# Altium PCB oled.PcbDoc
Units mil, origin at the board's own origin, x right, y up, seen from the top; angles counter-clockwise.
Board outline 6000 x 4000 mil, 2 copper layers (Top Layer, Bottom Layer); 14 components, 14 nets, 67 pads, 0 vias.
Unrouted connection lines stored in the file: 28.
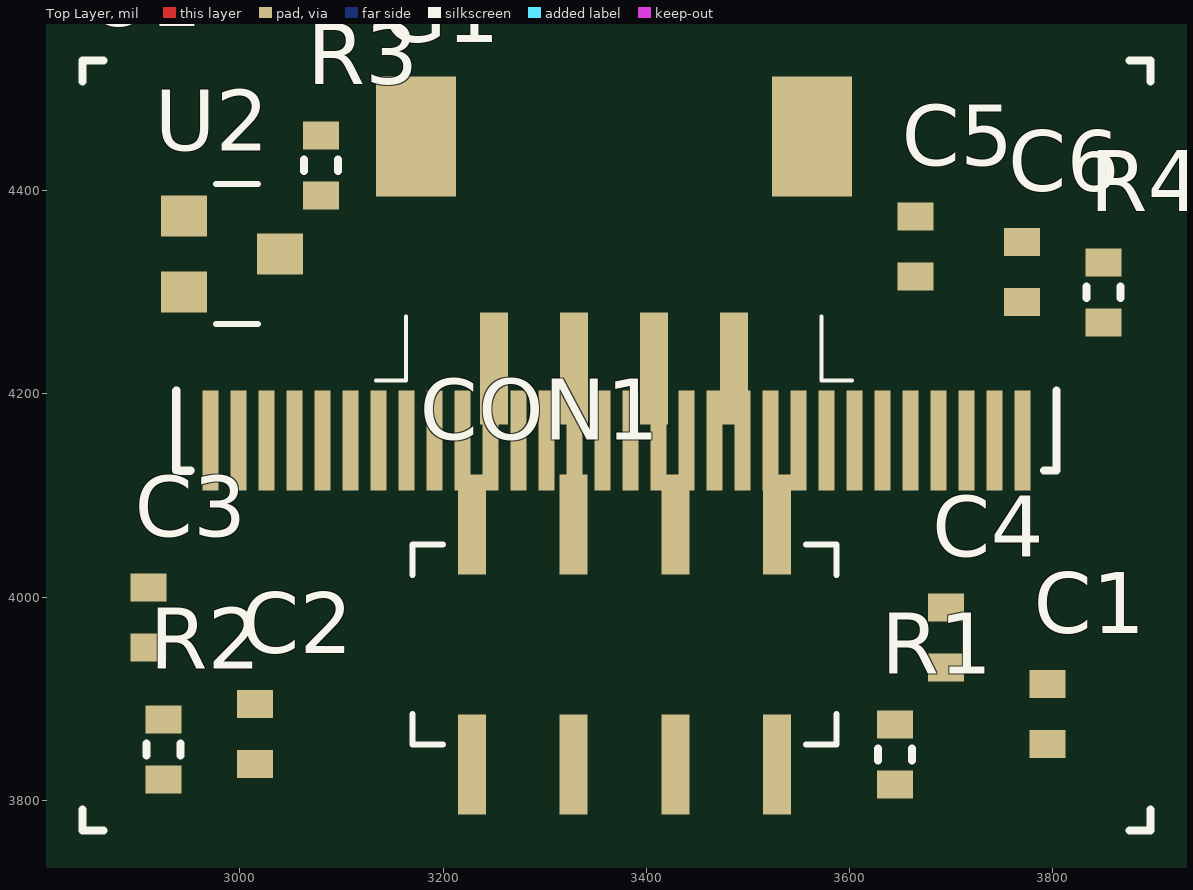
[diagram p0: Top Layer view]
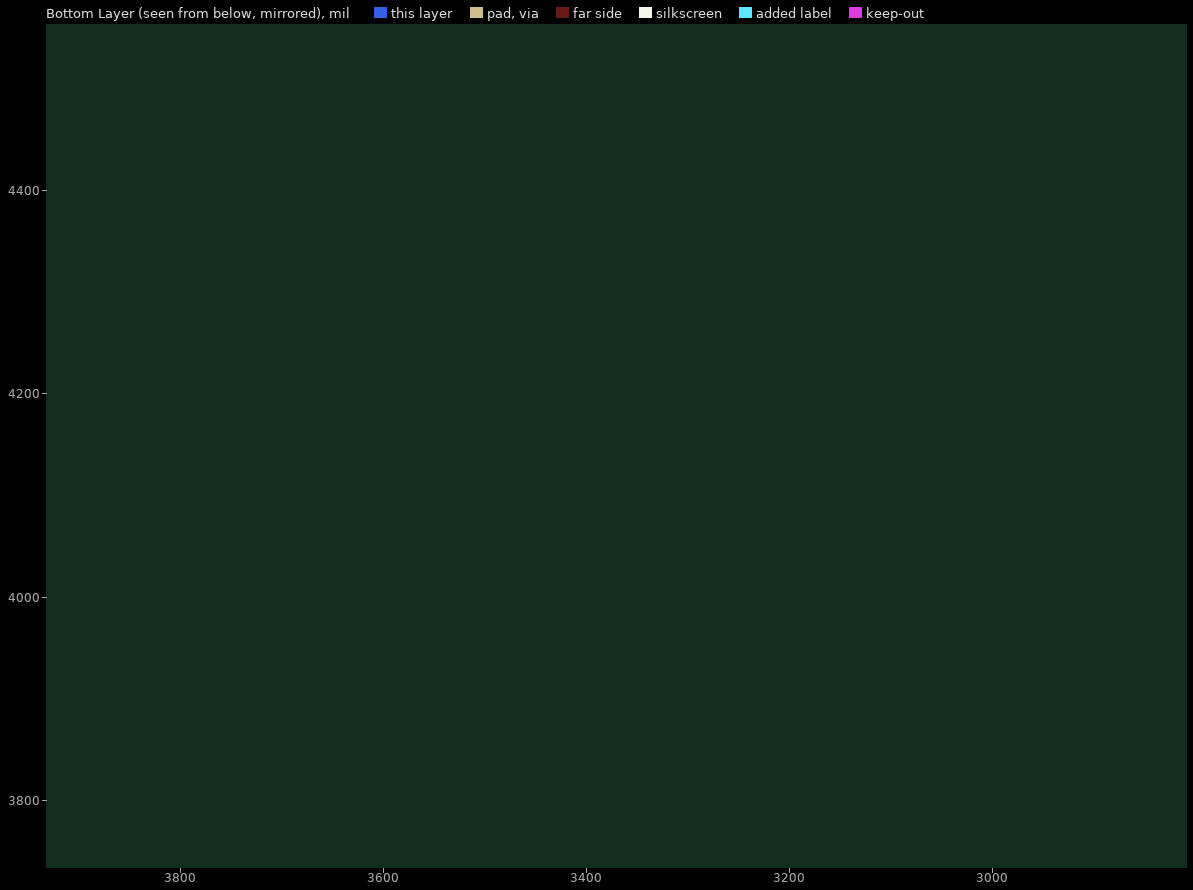
[diagram p1: Bottom Layer view, seen from below]

## Layer stack, top to bottom
Top Layer: signal copper 1.4
Dielectric: dielectric 12.6, FR-4, Dk 4.8
Bottom Layer: signal copper 1.4

## Board outline
1000,1000 7000,1000 7000,5000 1000,5000

## Design rules (kind name [scope] priority, off if disabled: settings)
Clearance [All] p1: gap=10
PolygonConnect [All] p1: connectstyle=Relief reliefconductorwidth=10 reliefentries=4 polygonreliefangle="90 Angle"
RoutingVias [All] p1: holewidth=28 width=50 viastyle="Through Hole" minholewidth=28 minwidth=50 maxholewidth=28 maxwidth=50
SilkscreenOverComponentPads [All] p1: minsilkscreentomaskgap=10
SolderMaskExpansion [All] p1: expansion=4
Width [All] p1: maxlimit=10 minlimit=10 preferedwidth=10
27 further rules are at their usual default settings.

## Components (designator, comment, footprint, x,y, rotation, side; value= is the part's Value field where it differs from the comment)
C1 "" 0603_C 3795,3885 r0 top
C2 "" 0603_C 3015,3865 r0 top
C3 "" 0603_C 2910,3980 r0 top
C4 "" 0603_C 3695,3960 r0 top
C5 "" 0603_C 3665,4345 r0 top
C6 "" 0603_C 3770,4320 r0 top
CON1 "CON2x4" 2x4P_SMT_2.54mm 3170,3855 r90 top
G1 "Grave" S4B-PH-SM4 3250,4225 r90 top
R1 "910K" 0603_R 3645,3845 r0 top
R2 "4.7K" 0603_R 2925,3850 r0 top
R3 "4.7K" 0603_R 3080,4425 r0 top
R4 "4.7K" 0603_R 3850,4300 r0 top
U1 "SSD1306" OLED-0.96-30 2845,3770 r0 top
U2 "662K" SOT23-3 2945,4375 r0 top

## Footprints (in the part's own frame and the unit in brackets; to place one, negate y for a bottom-side part, rotate by r counter-clockwise, add the part's x,y. Pads: shape width x height; smd on the part's side, far side on the other; paste and mask are expansions set on the pad)
2x4P_SMT_2.54mm [mm]
  rect 2.5x0.7 smd: 1(-0.5,-1.49) 2(5.5,-1.49) 3(-0.5,-4.03) 4(5.5,-4.03) 5(-0.5,-6.57) 6(5.5,-6.57) 7(-0.5,-9.11) 8(5.5,-9.11)
  silkscreen extent 0,-10.6 5,0
0603_C [mm] "Microbit"
  rect 0.9x0.7 smd: 1(0,0.75) 2(0,-0.75)
  body extent -0.42,-0.75 0.43,0.8, height 0.45
0603_R [mm] "Microbit"
  rect 0.9x0.7 smd: 1(0,0.75) 2(0,-0.75)
  silkscreen extent -0.43,-0.15 0.43,0.15, body extent -0.42,-0.75 0.43,0.8, height 0.45
OLED-0.96-30 [mm]
  rect 0.4x2.5 smd: 1(3.2,9.754) 2(3.9,9.754) 3(4.6,9.754) 4(5.3,9.754) 5(6,9.754) 6(6.7,9.754) 7(7.4,9.754) 8(8.1,9.754) 9(8.8,9.754) 10(9.5,9.754) 11(10.2,9.754) 12(10.9,9.754) 13(11.6,9.754) 14(12.3,9.754) 15(13,9.754) 16(13.7,9.754) 17(14.4,9.754) 18(15.1,9.754) 19(15.8,9.754) 20(16.5,9.754) 21(17.2,9.754) 22(17.9,9.754) 23(18.6,9.754) 24(19.3,9.754) 25(20,9.754) 26(20.7,9.754) 27(21.4,9.754) 28(22.1,9.754) 29(22.8,9.754) 30(23.5,9.754)
  silkscreen extent 0,0 26.7,19.26
S4B-PH-SM4 [mm]
  rect 2.8x0.7 smd: 1(0,0) 2(0,-2) 3(0,-4) 4(0,-6)
  rect 3x2 smd: P1(5.8,1.95) P2(5.8,-7.95)
  silkscreen extent -0.3,-8.95 1.3,2.95
SOT23-3 [mil]
  rect 45x40 smd: 1(0,0) 2(0,-74.8) 3(94.49,-37.4)
  silkscreen extent 31,-106 73,31

## Part data
C1 C2 C3 C4 C5 C6: library part Cap
G1: library part Grove
R1 R2 R3 R4: library part Res
U2: "或 S-1206B30-M3"

## Nets (pads, with @x,y where several pads share a name; then routed paths per layer and width w, separated by ;. In a path a pad name is that pad's centre, name@x,y a point inside that pad or via, vN(x,y) a via of type N, cw(c..) or ccw(c..) an arc to the next point about the centre after c; other vN are vias at no path point)
3V3: C1.2 CON1.2 R2.2 R4.2 U1.6 U1.9 U1.11 U2.2
GND: C1.1 C2.2 C3.1 C6.1 CON1.5 G1.4 R1.1 R3.2 U1.1 U1.8 U1.10 U1.12 U1.13 U1.16 U1.17 U1.21 U1.22 U1.23 U1.24 U1.25 U1.29 U1.30 U2.1
NetC2_1: C2.1 U1.28
NetC3_2: C3.2 U1.27
NetC4_1: C4.1 U1.5
NetC4_2: C4.2 U1.4
NetC5_1: C5.1 U1.3
NetC5_2: C5.2 U1.2
NetCON1_4: CON1.4 G1.2 U1.19 U1.20
NetCON1_6: CON1.6 G1.1 U1.18
NetR1_2: R1.2 U1.26
NetR2_1: R2.1 R3.1 U1.15
RES: C6.2 R4.1 U1.14
VCC: G1.3 U2.3
pads on no net: CON1.1 CON1.3 CON1.7 CON1.8 G1.P1 G1.P2 U1.7

## Text inside footprints (layer, text, board x,y; h text height)
U1: Mechanical 15 "9mm" at 3362,4294 h39.37 r90